# Altium PCB 4-Keyboard.PcbDoc
Units mil, origin at the board's own origin, x right, y up, seen from the top; angles counter-clockwise.
Board outline 3310 x 1900 mil, 2 copper layers (Top Layer, Bottom Layer), stack 18.548 mil thick; 18 components, 23 nets, 88 pads, 5 vias.
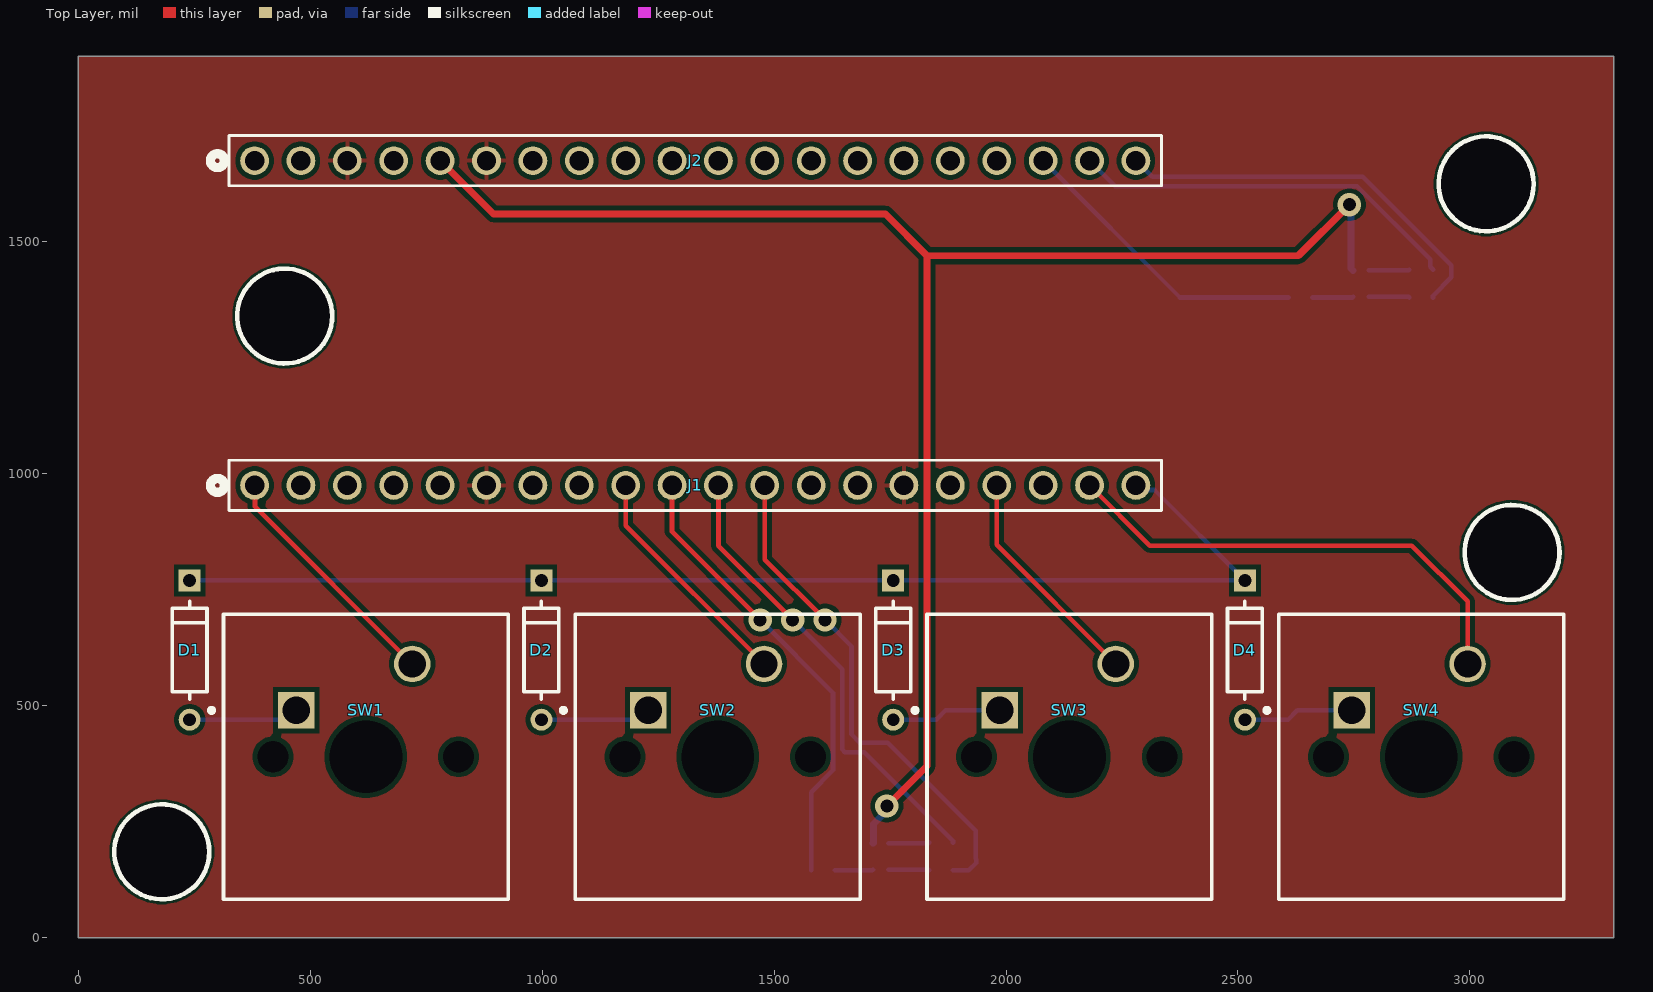
[diagram p0: Top Layer view]
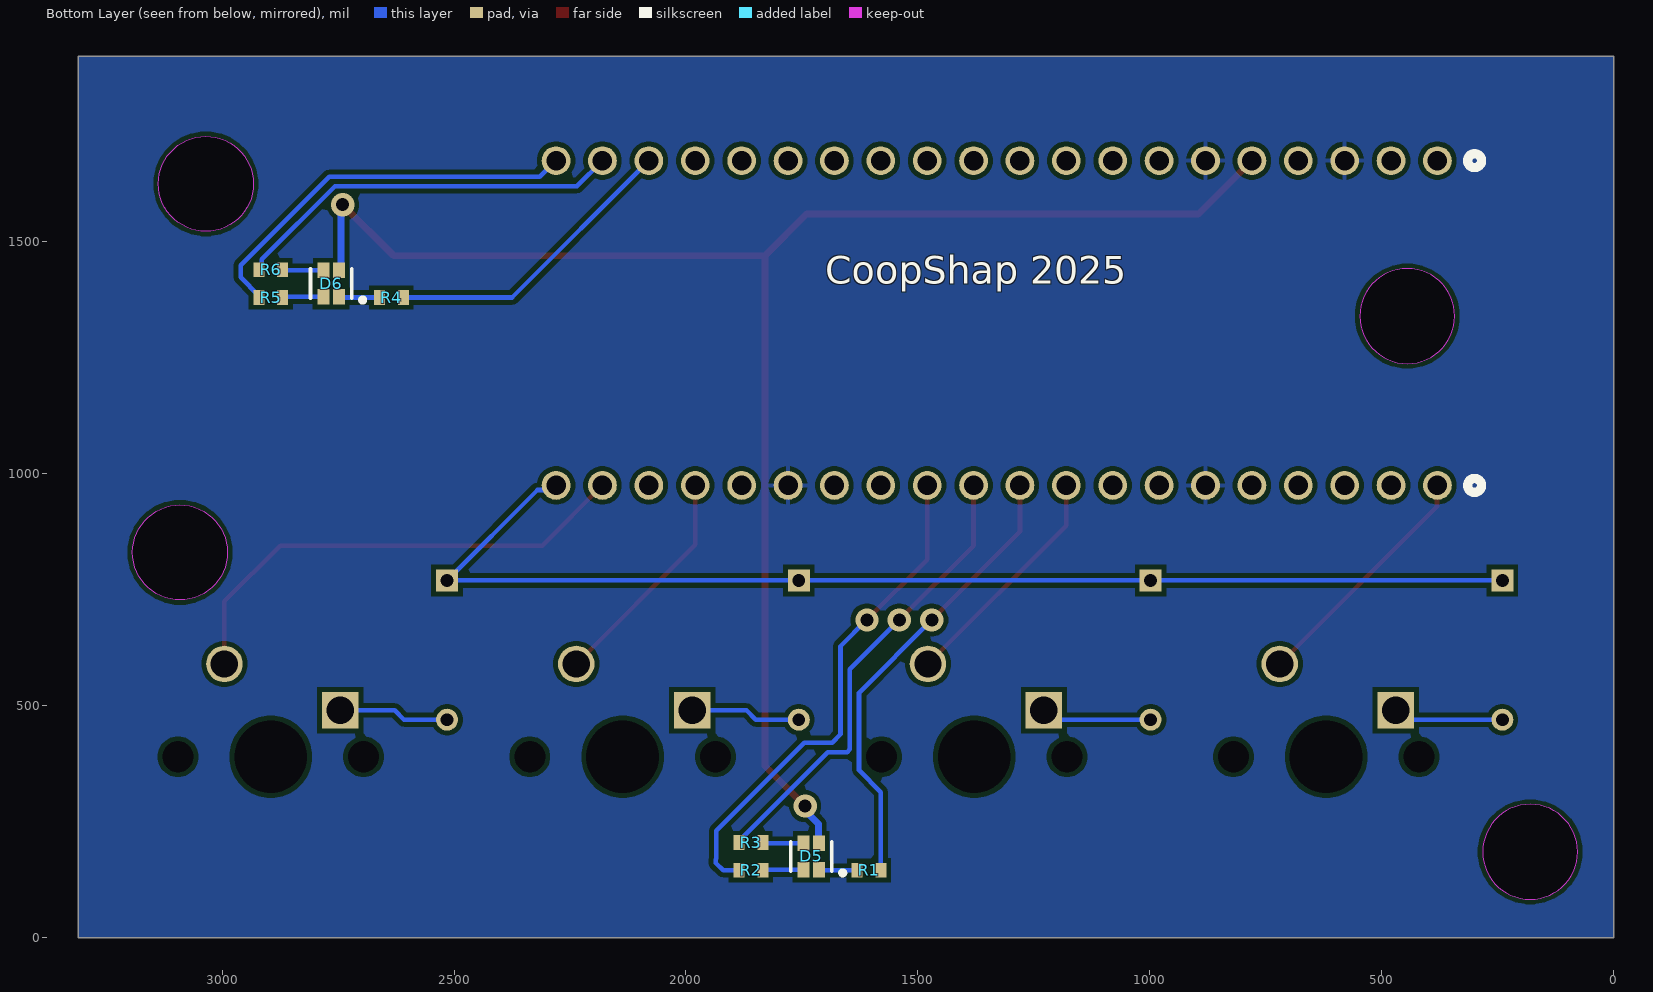
[diagram p1: Bottom Layer view, seen from below]

## Layer stack, top to bottom
Top Solder: solder mask 0.4, Solder Resist, Dk 3.5
Top Layer: signal copper 1.4
Dielectric 1: dielectric 15.748, FR-4, Dk 4.8
Bottom Layer: signal copper 1.4
Bottom Solder: solder mask 0.4, Solder Resist, Dk 3.5

## Board outline
0,0 3310,0 3310,1900 0,1900
cut-out: 180,82.64 cw(c180,185) 77.64,185 cw(c180,185) 180,287.36 cw(c180,185) 282.36,185 cw(c180,185)
cut-out: 2988.47,830.43 ccw(c3090.83,830.43) 3090.83,728.07 ccw(c3090.83,830.43) 3193.19,830.43 ccw(c3090.83,830.43) 3090.83,932.79 ccw(c3090.83,830.43)
cut-out: 445,1237.64 cw(c445,1340) 342.64,1340 cw(c445,1340) 445,1442.36 cw(c445,1340) 547.36,1340 cw(c445,1340)
cut-out: 2932.64,1625 ccw(c3035,1625) 3035,1522.64 ccw(c3035,1625) 3137.36,1625 ccw(c3035,1625) 3035,1727.36 ccw(c3035,1625)

## Design rules (kind name [scope] priority, off if disabled: settings)
Clearance [All] p1: gap=10 ignorepadtopadclearanceinfootprint=FALSE
PolygonConnect [All] p1: connectstyle=Relief reliefconductorwidth=10 reliefentries=4 polygonreliefangle="90 Angle" airgapwidth=10
RoutingVias [All] p1: holewidth=28 width=50 viastyle="Through Hole" minholewidth=28 minwidth=50 maxholewidth=28 maxwidth=50
SolderMaskExpansion [All] p1: expansion=4 istentingtop=FALSE
SupplyNets "Schematic Supply Nets_1" [InNet('GND')] p1: voltage=0.000
SupplyNets "Schematic Supply Nets" [InNet('VCC')] p2: voltage=0.000
Width [All] p1: maxlimit=15 minlimit=10 preferedwidth=10 minimp=50.000000 maximp=50.000000 favimp=50.000000
30 further rules are at their usual default settings.

## Components (designator, comment, footprint, x,y, rotation, side; value= is the part's Value field where it differs from the comment)
D1 "1N4148" FP-017AG-MFG 240,620 r270 top
D2 "1N4148" FP-017AG-MFG 998.33,620 r270 top
D3 "1N4148" FP-017AG-MFG 1756.67,620 r270 top
D4 "1N4148" FP-017AG-MFG 2515,620 r270 top
D5 "LTST-C19HE1WT" FP-LTST-C19HE1WT-MFG 1730,175 r0 bottom
D6 "LTST-C19HE1WT" FP-LTST-C19HE1WT-MFG 2765,1410 r0 bottom
J1 "22284205" CONN_SD-42375-001_M295_20_MOL 380,975 r180 top
J2 "22284205" CONN_SD-42375-001_M295_20_MOL 380,1675 r180 top
R1 "RC0603JR-07330RL" RESC1608X55X25LL10T15 1605.59,145 r180 bottom
R2 "RC0603JR-07330RL" RESC1608X55X25LL10T15 1860,145 r0 bottom
R3 "RC0603JR-07330RL" RESC1608X55X25LL10T15 1860,205 r0 bottom
R4 "RC0603JR-07330RL" RESC1608X55X25LL10T15 2635,1380 r180 bottom
R5 "RC0603JR-07330RL" RESC1608X55X25LL10T15 2895,1380 r0 bottom
R6 "RC0603JR-07330RL" RESC1608X55X25LL10T15 2895,1440 r0 bottom
SW1 "MX1A-11NW" CHRY-MX1A-11NW_V 620,390 r0 top
SW2 "MX1A-11NW" CHRY-MX1A-11NW_V 1378.33,390 r0 top
SW3 "MX1A-11NW" CHRY-MX1A-11NW_V 2136.67,390 r0 top
SW4 "MX1A-11NW" CHRY-MX1A-11NW_V 2895,390 r0 top

## Footprints (in the part's own frame and the unit in brackets; to place one, negate y for a bottom-side part, rotate by r counter-clockwise, add the part's x,y. Pads: shape width x height; smd on the part's side, far side on the other; paste and mask are expansions set on the pad)
CHRY-MX1A-11NW_V [mm] "THD, 2-Leads, Body 15.6x15.6mm"
  rect 2x2 hole 1.499 paste-2539.97: 1(-3.81,2.54)
  round 2 hole 1.499 paste-2539.97: 2(2.54,5.08)
  round 0 hole 3.988 unplated paste-2539.97: MH1(0,0)
  round 0 hole 1.702 unplated paste-2539.97: MH2(-5.08,0) MH3(5.08,0)
  silkscreen extent -8.57,-7.8 7.8,7.8, body extent -7.8,-7.8 7.8,7.8, height 15.2
CONN_SD-42375-001_M295_20_MOL [mil]
  round 62 hole 42: 1(0,0) 2(-100,0) 3(-200,0) 4(-300,0) 5(-400,0) 6(-500,0) 7(-600,0) 8(-700,0) 9(-800,0) 10(-900,0) 11(-1000,0) 12(-1100,0) 13(-1200,0) 14(-1300,0) 15(-1400,0) 16(-1500,0) 17(-1600,0) 18(-1700,0) 19(-1800,0) 20(-1900,0)
  silkscreen extent -1955,-54 95,54
FP-017AG-MFG [mm]
  rect 1.2x1.2 hole 0.7 paste-2539.97 mask+0: 1(-3.813,0)
  round 1.2 hole 0.7 paste-2539.97 mask+0: 2(3.813,0)
  silkscreen extent -2.68,-0.95 2.68,0.95, body extent -4.51,-1.05 4.51,1.05, height 0.25
FP-LTST-C19HE1WT-MFG [mm]
  rect 0.65x0.85 smd paste+0 mask+0: 1(-0.425,0.725) 2(0.425,0.725) 3(0.425,-0.725) 4(-0.425,-0.725)
  silkscreen extent -1.85,-0.8 1.12,1.02, body extent -0.8,-0.8 0.8,0.8, height 0.35
RESC1608X55X25LL10T15 [mm] "Chip Resistor, 2-Leads, Body 1.60x0.80mm, IPC High Density"
  rect 0.6x0.8 smd: 1(-0.65,0) 2(0.65,0)
  body extent -0.85,-0.45 0.85,0.45, height 0.55

## Part data
D1 D2 D3 D4: library part CMP-07163-000046-1, "DIODE GEN PURP 100V 200MA DO35", Average Rectified Current=200mA, Capacitance=4pF, Case/Package=DO-35, Current=4A, Forward Current=300mA, Forward Voltage=1V, Max Forward Surge Current (Ifsm)=1A, Max Operating Temperature=175°C, Max Power Dissipation=500mW, Max Repetitive Reverse Voltage (Vrrm)=100V, Max Reverse Current=5uA, Min Operating Temperature=-65°C, Package Quantity=2000, Contact Plating=Tin, Current Rating=200mA, Diameter=1.91mm, Element Configuration=Single, Height=4.56mm, Lead Free="Lead Free", Length=4.56mm, Max Reverse Voltage (DC)=100V, Max Surge Current=4A, Mount="Through Hole", Number of Pins=2, Output Current=200mA, Outside Diameter=1.85mm, Packaging=Bulk, Peak Non-Repetitive Surge Current=4A, Polarity=Standard, Power Dissipation=500mW, Radiation Hardening=No, REACH SVHC="No SVHC", Recovery Time=4ns, Reverse Recovery Time=4ns, Reverse Voltage=100V, Series=-, Voltage=100V, Voltage Rating (DC)=100V, Weight=0.01lb, Width=1.91mm
D5 D6: library part CMP-2000-05201-2, "LED RGB DIFFUSED CHIP SMD", Case Code (Imperial)=0606, Case Code (Metric)=1616, Color=Blue, Forward Current=20mA, Forward Voltage=3.35V, Lens Color=White, Max Operating Temperature=80°C, Min Operating Temperature=-20°C, Package Quantity=3000, Reverse Voltage=5V, Case/Package=0606, Depth=1.6mm, Dominant Wavelength=470nm, Height=0.35mm, Lead Free="Lead Free", Length=1.6mm, Lens Style=Diffused, Lens Transparency=Diffused, Luminous Intensity=180mcd, Mount="Surface Mount", Number of Elements=3, Number of LEDs=3, Number of Pins=4, Packaging="Tape and Reel", Radiation Hardening=No, Test Current=20mA, Viewing Angle=130°, Width=1.6mm
J1 J2: Package=None, Availability=Unavailable, MP=22284205, Price=None
R1 R2 R3 R4 R5 R6: library part CMP-2000-06958-1, "Chip Resistor, 330 Ohm, +/- 5%, 50 V, -55 to 155 degC, 0603 (1608 Metric), -40 to 155 degC, RoHS, Tape and Reel", Manufacturer=Yageo, Package Description="2-Pin Surface Mount Device, Body 1.6 x 0.8 mm", Package Reference=0603, Power Rating=100mW, Resistance=330ohm, Resistance Tolerance=±5%, Resistor Case Style=0603[1608Metric], Resistor Element Type=ThickFilm, Temperature Coefficient=±100ppm/°C, Voltage Rating=50V, Automotive Qualification Standard=-, Datasheet URL=http://www.yageo.com/documents/recent/PYu-RC_Group_51_RoHS_L_7.pdf, Datasheet Version="Rev. 7, 05/2017", Manufacturer URL=http://www.yageo.com/, Mounting Technology=SurfaceMount, MSL=MSL1-Unlimited, Packaging=CutTape, Product Range=RCSeries, SVHC=ToBeAdvised
SW1 SW2 SW3 SW4: library part CMP-2000-06786-1, "Keylock Switch, 12 V, -10 to 70 degC, 2-Pin THD, RoHS, Bulk", Actuator Color=N/A, Illumination Color=N/R, Manufacturer=Cherry, Maximum AC Voltage Rating=12V, Maximum Contact Resistance=200mOhm, Maximum Current Rating=0.01A, Minimum Insulation Resistance=100MOhm, Operating Force=0.58N, Operating Temperature=-10to70C, Package Description="2-Pin Through Hole Device, Body 15.6 x 15.6 mm", Part No=MX1A11NW, Actuator Length=3.6mm, Actuator Material=N/A, Actuator Style=Button, Body Orientation=Straight, Contact Material=Silver/Gold, Contact Plating=N/A, COO=UK, Datasheet URL=https://cdn.sparkfun.com/datasheets/Components/Switches/MX%20Series.pdf, Datasheet Version=09/2000, Dielectric Strength=N/A, Dimension=15.6x15.6x15.2mm, ECCN=EAR99, Electrical Life=50000000Cycle, Family=MX, Housing Material=N/A, HTS=8536509065, Illumination Type=N/R, IP Rating=N/A, Manufacturer URL=http://cherryswitches.com/cn/, Maximum DC Voltage Rating=12V, Maximum Power Rating=N/A, Mechanical Life=N/A, Mounting=ThroughHole, Mounting Technology=ThroughHole, Number of Terminals=2, Operating Speed=N/A, Package Reference=MX1A-11NW, Packaging=N/A, Pole Throw Configuration=SPST, RoHS=Unknown, Row Spacing=6.35mm, Supplier=CherryElectrical, Switch Configuration=N.O., Terminal Pitch=2.54mm, Terminal Type=PCPins, Total Travel=4.06mm, Type=DesktopProfile

## Via types
v1: diameter 50, hole 28, Top Layer to Bottom Layer, 5 vias

## Nets (pads, with @x,y where several pads share a name; then routed paths per layer and width w, separated by ;. In a path a pad name is that pad's centre, name@x,y a point inside that pad or via, vN(x,y) a via of type N, cw(c..) or ccw(c..) an arc to the next point about the centre after c; other vN are vias at no path point)
GND: J1.6 J1.15 J2.3 J2.6
NetD1_1: D1.1 D2.1 D3.1 D4.1 J1.20 | length 2594.9
  Bottom Layer w10: D1.1 D2.1 D3.1 D4.1 2320.07,965.05 2289.95,965.05 J1.20
NetD1_2: D1.2 SW1.1 | length 238.3
  Bottom Layer w10: D1.2 449.88,469.88 SW1.1
NetD2_2: D2.2 SW2.1 | length 238.3
  Bottom Layer w10: D2.2 1208.22,469.88 SW2.1
NetD3_2: D3.2 SW3.1 | length 238.3
  Bottom Layer w10: D3.2 1849.46,469.88 1869.58,490 SW3.1
NetD4_2: D4.2 SW4.1 | length 238.3
  Bottom Layer w10: D4.2 2607.79,469.88 2627.91,490 SW4.1
NetD5_1: D5.1 R1.1 | length 82.7
  Bottom Layer w10: R1.1 1711.81,145 D5.1
NetD5_2: D5.2 R2.1 | length 88.3
  Bottom Layer w10: D5.2 1832.95,146.46 R2.1
NetD5_3: D5.3 R3.1 | length 88.3
  Bottom Layer w10: D5.3 1832.95,203.54 R3.1
NetD6_1: D6.1 R4.1 | length 88.3
  Bottom Layer w10: R4.1 2746.81,1380 D6.1
NetD6_2: D6.2 R5.1 | length 88.3
  Bottom Layer w10: D6.2 2867.95,1381.46 R5.1
NetD6_3: D6.3 R6.1 | length 88.3
  Bottom Layer w10: D6.3 2867.95,1438.54 R6.1
NetJ1_1: J1.1 SW1.2 | length 525.8
  Top Layer w10: J1.1 381,974 381,929 SW1.2
NetJ1_9: J1.9 SW2.2 | length 508.6
  Top Layer w10: J1.9 1180,888.33 SW2.2
NetJ1_10: J1.10 R1.2 | length 993.1
  Top Layer w10: J1.10 1280,875 v1(1470,685)
  Bottom Layer w10: v1(1470,685) 1626.83,528.17 1626.83,360.49 1580,313.65 R1.2
NetJ1_11: J1.11 R3.2 | length 1003.9
  Top Layer w10: J1.11 1380,845 v1(1540,685)
  Bottom Layer w10: v1(1540,685) 1646.83,578.17 1646.83,405.86 1652.69,400 1694.53,400 1885.59,208.94 R3.2
NetJ1_12: J1.12 R2.2 | length 1094.9
  Top Layer w10: J1.12 1480,815 v1(1610,685)
  Bottom Layer w10: v1(1610,685) 1666.83,628.17 1666.83,438.17 1685,420 1745,420 1935,230 1935,170 1935.86,169.14 1935.86,160.86 1920,145 R2.2
NetJ1_17: J1.17 SW3.2 | length 491.3
  Top Layer w10: J1.17 1980,846.67 SW3.2
NetJ1_19: J1.19 SW4.2 | length 1053.6
  Top Layer w10: J1.19 2310,845 2875,845 2995,725 SW4.2
NetJ2_18: J2.18 R4.2 | length 651.6
  Bottom Layer w10: J2.18 2375,1380 R4.2
NetJ2_19: J2.19 R6.2 | length 847.3
  Bottom Layer w10: J2.19 2235,1620 2756.57,1620 2914.19,1462.38 2914.19,1446.4 R6.2
NetJ2_20: J2.20 R5.2 | length 859.1
  Bottom Layer w10: J2.20 2315,1640 2769.36,1640 2960,1449.36 2960,1423.35 2920.59,1383.94 R5.2
VCC: D5.4 D6.4 J2.5 | length 3550.2
  Top Layer w15: J2.5 895,1560 1740,1560 1830,1470 ; v1(1743.01,283.51) 1830,370.5 1830,1470 ; v1(2740,1580) 2630,1470 1830,1470
  Bottom Layer w15: D5.4 1714.13,204.41 1714.13,245.21 1743.01,274.08 v1(1743.01,283.51) ; v1(2740,1580) 2744.13,1575.87 2744.13,1442.68 D6.4
pads on no net: J1.2 J1.3 J1.4 J1.5 J1.7 J1.8 J1.13 J1.14 J1.16 J1.18 J2.1 J2.2 J2.4 J2.7 J2.8 J2.9 J2.10 J2.11 J2.12 J2.13 J2.14 J2.15 J2.16 J2.17 SW1.MH1 SW1.MH2 SW1.MH3 SW2.MH1 SW2.MH2 SW2.MH3 SW3.MH1 SW3.MH2 SW3.MH3 SW4.MH1 SW4.MH2 SW4.MH3

## Polygon pours and split planes (outlines as drawn)
GND on Top Layer "GND_L01_P002" (solid, pour order 2): 0,0 3310,0 3310,1900 0,1900
GND on Bottom Layer "GND_L02_P003" (solid, pour order 3): 0,0 3310,0 3310,1900 0,1900

## Other copper
Bottom Layer:
  pour cut-out: 445,1237.64 cw(c445,1340) 342.64,1340 cw(c445,1340) 445,1442.36 cw(c445,1340) 547.36,1340 cw(c445,1340)
  pour cut-out: 2932.64,1625 ccw(c3035,1625) 3035,1522.64 ccw(c3035,1625) 3137.36,1625 ccw(c3035,1625) 3035,1727.36 ccw(c3035,1625)

## Silkscreen, mask and mechanical layers (free items; w line width, h text height)
Top Overlay:
  circle w10: c180,185 r102.36
  circle w10: c3090.83,830.43 r102.36
  circle w10: c445,1340 r102.36
  circle w10: c3035,1625 r102.36
Bottom Overlay:
  text "CoopShap 2025" at 1700,1409.99 h60